# EAGLE board wifi_alarm (EAGLE 9.6.2)
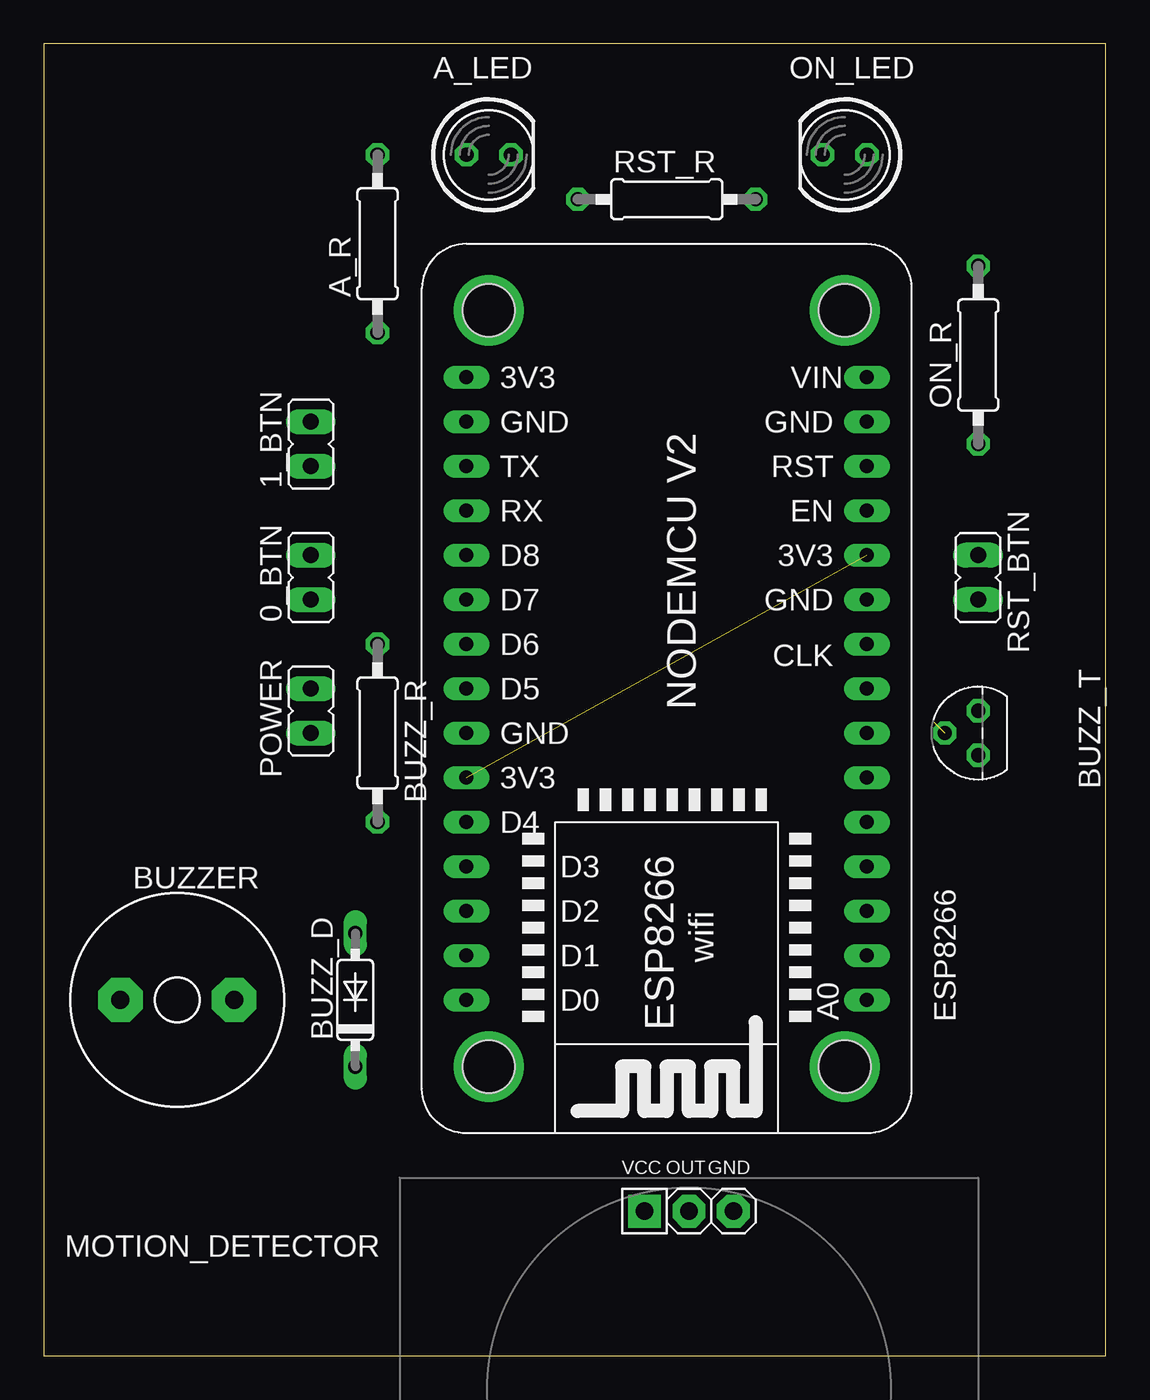
[diagram p0: board, top side]
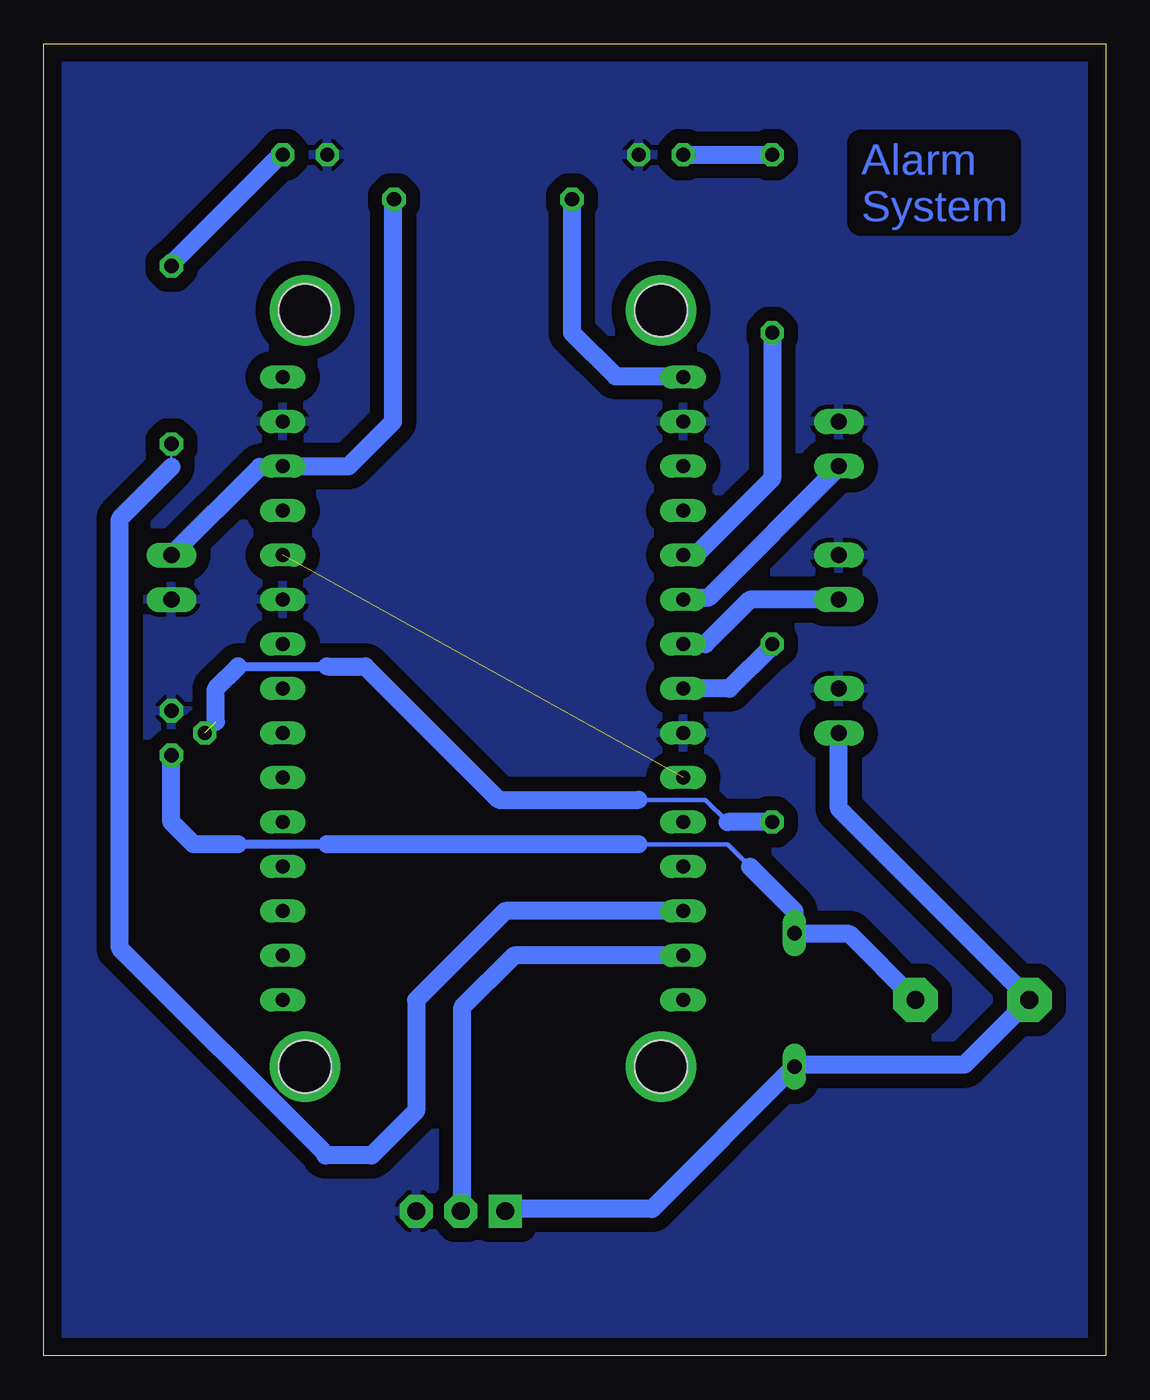
[diagram p1: board, bottom side, seen from below]

Size 60.63 x 74.92 mm. Coordinates in mm from the lower left corner, seen from the top.
Outline: 0,0 60.63,0 60.63,74.92 0,74.92 0,0
Copper layers (1*16): Top 0.035mm / dielectric 1.5mm / Bottom 0.035mm
Design rules "default": minimum track width 6mil, minimum drill 0.35mm, track to track 6mil, track to pad 6mil, pad to pad 6mil, via to via 6mil, smd to smd 6mil, copper to edge 40mil, drill to drill 6mil, minimum pad ring 10mil, minimum via ring 8mil, stop-mask expansion 4mil, vias tented up to drill 0mil, thermal gap 10mil

## Footprints (pad centres in the part's own frame; a part is rotated, then mirrored left to right if it is on the bottom)
JP1 = drill 0.914 long: 1 0,-1.27; 2 0,1.27
LED5MM = drill 0.813 octagon: A -1.27,0; K 1.27,0
0207/10 = drill 0.813 octagon: 1 -5.08,0; 2 5.08,0
DO35-7 = drill 0.813 long: A 3.81,0; C -3.81,0
TO92 = drill 0.813 octagon: 1 1.27,0; 2 0,1.905; 3 -1.27,0
AL60P = drill 1.016 pad 2.54 octagon: 1 -3.251,0; 2 3.251,0
NODEMCU_ESP8266 = drill 0.8 long: 3V3@1 -11.43,19.05; 3V3@2 -11.43,-3.81; 3V3@3 11.43,8.89; A0 11.43,-16.51; CLK 11.43,3.81; CMD 11.43,-1.27; D0 -11.43,-16.51; D1 -11.43,-13.97; D2 -11.43,-11.43; D3 -11.43,-8.89; D4 -11.43,-6.35; D5 -11.43,1.27; D6 -11.43,3.81; D7 -11.43,6.35; D8 -11.43,8.89; EN 11.43,11.43; GND@1 -11.43,16.51; GND@2 -11.43,-1.27; GND@3 11.43,6.35; GND@4 11.43,16.51; RST 11.43,13.97; RSV1 11.43,-11.43; RSV2 11.43,-13.97; RX -11.43,11.43; SD1 11.43,-3.81; SD2 11.43,-6.35; SD3 11.43,-8.89; SDO 11.43,1.27; TX -11.43,13.97; VIN 11.43,19.05 | drill 3: P$31 10.16,22.86; P$32 -10.16,22.86; P$33 -10.16,-20.32; P$34 10.16,-20.32 | hole 3: 10.16,22.86; 10.16,-20.32; -10.16,-20.32; -10.16,22.86
HC-SR501 = drill 1.016 pad 1.88 octagon: GND 2.54,10.795; OUT 0,10.795 | drill 1.016 pad 1.88 square: VCC -2.54,10.795

## Placement (x,y rotation side)
0_BTN  [JP1]  15.24,44.45 0 top
1_BTN  [JP1]  15.24,52.07 0 top
A_LED  [LED5MM]  25.4,68.58 0 top
A_R  22  [0207/10]  19.05,63.5 90 top
BUZZ_D  1N4148  [DO35-7]  17.78,20.32 90 top
BUZZ_R  1k  [0207/10]  19.05,35.56 270 top
BUZZ_T  BC547  [TO92]  53.34,35.56 90 top
BUZZER  AL60P  [AL60P]  7.62,20.32 0 top
ESP8266  NODEMCU_ESP8266  [NODEMCU_ESP8266]  35.56,36.83 0 top
MOTION_DETECTOR  HC-SR501  [HC-SR501]  36.83,-2.54 0 top
ON_LED  [LED5MM]  45.72,68.58 180 top
ON_R  100  [0207/10]  53.34,57.15 90 top
POWER  [JP1]  15.24,36.83 0 top
RST_BTN  [JP1]  53.34,44.45 180 top
RST_R  10k  [0207/10]  35.56,66.04 0 top

## Library data of the parts
0_BTN 1_BTN POWER RST_BTN = jumper
A_LED ON_LED = led
A_R BUZZ_R ON_R RST_R = rcl; SPICEPREFIX: R
BUZZ_D = diode
BUZZ_T = transistor
BUZZER = buzzer; OC_FARNELL: unknown; OC_NEWARK: unknown
ESP8266 = nodemcu_esp8266
MOTION_DETECTOR = Sensors_PIR_Lux

## Nets
3V3: ESP8266.3V3@2 ESP8266.3V3@3
+5V: BUZZ_D.C BUZZER.1 MOTION_DETECTOR.VCC POWER.1
GND: 0_BTN.2 1_BTN.2 A_LED.K BUZZ_T.1 ESP8266.GND@1 ESP8266.GND@2 ESP8266.GND@3 ESP8266.GND@4 MOTION_DETECTOR.GND ON_LED.K POWER.2 RST_BTN.2
N$1: ESP8266.3V3@1 RST_R.1
N$2: ESP8266.RST RST_BTN.1 RST_R.2
N$3: 0_BTN.1 ESP8266.D6
N$5: 1_BTN.1 ESP8266.D7
N$6: BUZZ_D.A BUZZ_T.3 BUZZER.2
N$7: BUZZ_R.1 ESP8266.D5
N$8: BUZZ_R.2 BUZZ_T.2
N$11: A_R.1 ESP8266.D8
N$12: A_LED.A A_R.2
N$13: ESP8266.D2 ON_R.1
N$14: ON_LED.A ON_R.2
N$15: ESP8266.D1 MOTION_DETECTOR.OUT
VIN: ESP8266.VIN

## Tracks (layer width: path | path; a pad name or v marks a point on that pad's centre or on a via)
3V3  (1 unrouted)
+5V
  Bottom 0.152: 17.68,16.61 BUZZ_D.C | 4.42,20.42 BUZZER.1 | 34.29,8.38 MOTION_DETECTOR.VCC
  Bottom 1.016: 17.68,16.61 8.08,16.61 BUZZER.1 | POWER.1 15.24,31.24 4.42,20.42 | 34.29,8.38 25.91,8.38 BUZZ_D.C
GND
  pour Bottom (isolate 0.813): -1.27,76.2 62.23,76.2 62.23,-1.27 -1.27,-1.27
N$1
  Bottom 0.152: 24.23,55.93 ESP8266.3V3@1
  Bottom 1.016: 24.23,55.93 27.99,55.93 30.48,58.42 RST_R.1
N$2
  Bottom 0.152: 47.09,50.75 ESP8266.RST | 40.69,65.99 RST_R.2
  Bottom 1.016: 47.09,50.75 48.31,50.75 RST_BTN.1 | 40.69,65.99 40.69,53.34 43.23,50.8 ESP8266.RST
N$3
  Bottom 1.016: 24.08,40.69 ESP8266.D6 22.86,40.64 20.32,43.18 0_BTN.1
N$5
  Bottom 0.152: 24.08,43.28 ESP8266.D7 | 15.24,50.75 1_BTN.1
  Bottom 1.016: 24.08,43.28 22.71,43.28 15.24,50.75
N$6
  Bottom 0.152: 17.68,24.08 BUZZ_D.A
  Bottom 0.254: 20.32,27.94 21.59,29.21 26.67,29.21
  Bottom 0.508: 44.45,29.21 49.53,29.21
  Bottom 1.016: 17.68,24.08 14.63,24.08 BUZZER.2 | 20.32,27.94 17.78,25.4 BUZZ_D.A | BUZZ_T.3 53.34,30.48 52.07,29.21 49.53,29.21 | 26.67,29.21 44.45,29.21
N$7
  Bottom 0.152: 19.05,40.54 BUZZ_R.1
  Bottom 1.016: ESP8266.D5 21.49,38.1 19.05,40.54
N$8  (1 unrouted)
  Bottom 0.254: 26.67,31.75 22.86,31.75 21.59,30.48
  Bottom 0.508: 49.53,39.37 44.45,39.37
  Bottom 1.016: BUZZ_R.2 21.59,30.48 | 26.67,31.75 34.65,31.75 42.27,39.37 44.45,39.37 | 50.8,36.2 50.8,38.1 49.53,39.37
N$11
  Bottom 1.016: ESP8266.D8 23.42,45.72 19.05,50.09 A_R.1
N$12
  Bottom 1.016: A_LED.A A_R.2
N$13
  Bottom 0.152: 53.34,50.75 ON_R.1
  Bottom 0.508: 44.68,11.66 44.68,11.55 44.56,11.43
  Bottom 1.016: 53.34,50.75 56.29,47.8 56.29,23.27 44.68,11.66 | ESP8266.D2 34.29,25.4 39.37,20.32 39.37,13.97 41.91,11.43 44.56,11.43
N$14
  Bottom 0.152: 47.09,68.58 ON_LED.A
  Bottom 1.016: ON_R.2 53.34,62.33 47.09,68.58
N$15
  Bottom 0.152: 36.73,8.38 MOTION_DETECTOR.OUT
  Bottom 1.016: ESP8266.D1 33.78,22.86 36.73,19.91 36.73,8.38

## Text on the board
Bottom: Alarm / System